# EAGLE board PCB-111000_V2 (EAGLE 9.6.2)
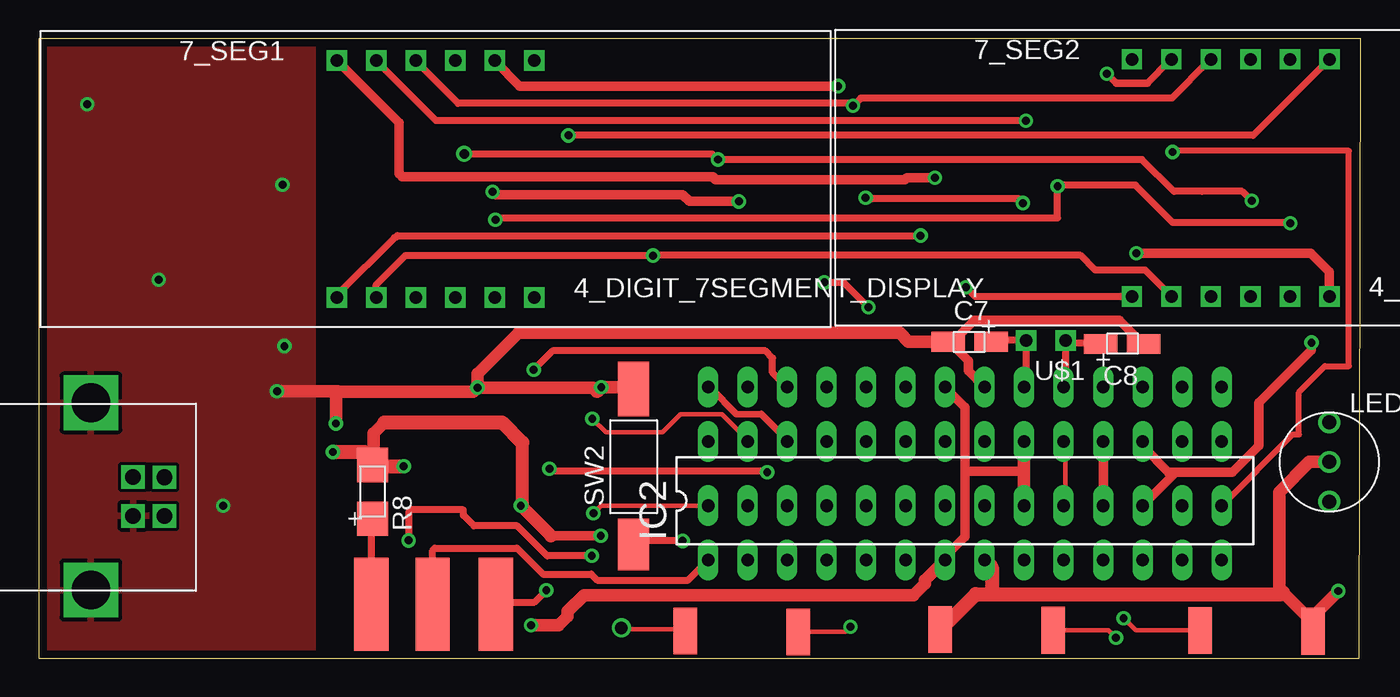
[diagram p0: board, top side]
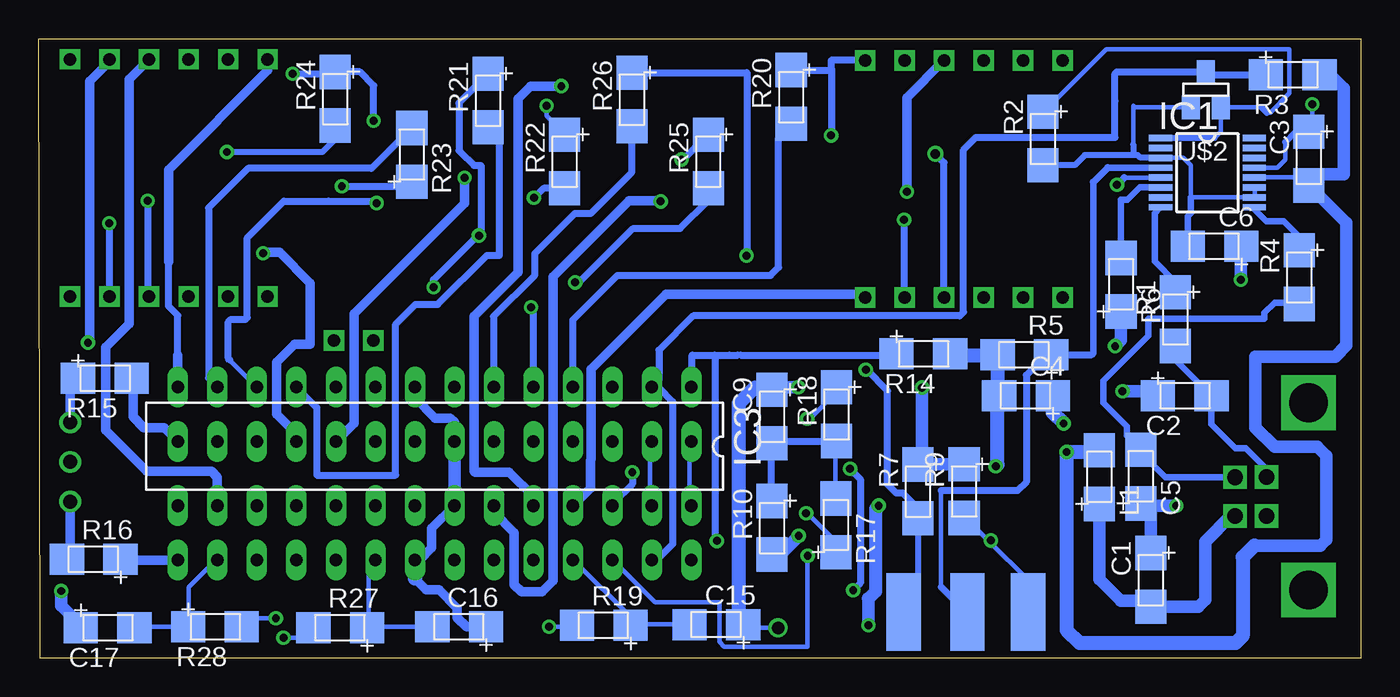
[diagram p1: board, bottom side, seen from below]

Size 85 x 39.8 mm. Coordinates in mm from the lower left corner, seen from the top.
Outline: 0,0 84.9,0 85,39.8 0,39.8 0,0
Copper layers (1*16): Top 0.035mm / dielectric 1.5mm / Bottom 0.035mm
Design rules "default *": minimum track width 12mil, minimum drill 20mil, track to track 8mil, track to pad 8mil, pad to pad 8mil, via to via 8mil, smd to smd 8mil, copper to edge 20mil, drill to drill 8mil, minimum pad ring 10mil, minimum via ring 8mil, stop-mask expansion 4mil, vias tented up to drill 0mil, thermal gap 10mil

## Footprints (pad centres in the part's own frame; a part is rotated, then mirrored left to right if it is on the bottom)
4_DIGIT_7SEGMENT_DISPLAY = drill 0.8 square: P$1 0,0; P$2 2.54,0; P$3 5.08,0; P$4 7.62,0; P$5 10.16,0; P$6 12.7,0; P$7 12.7,15.24; P$8 10.16,15.24; P$9 7.62,15.24; P$10 5.08,15.24; P$11 2.54,15.24; P$12 0,15.24
1206 = smd 2.2 x 2: P$1 -1.75,0; P$2 1.7,0
0805 = smd 2.159 x 1.27: 1 -1.404,0.1; 2 1.354,0.1
SSOP16 = smd 1.5 x 0.406: 1 -3.018,2.223; 2 -3.018,1.587; 3 -3.018,0.953; 4 -3.018,0.318; 5 -3.018,-0.318; 6 -3.018,-0.953; 7 -3.018,-1.587; 8 -3.018,-2.223; 9 3.018,-2.223; 10 3.018,-1.587; 11 3.018,-0.953; 12 3.018,-0.318; 13 3.018,0.318; 14 3.018,0.953; 15 3.018,1.587; 16 3.018,2.223
DIL28-3 = drill 0.813 long: 1 -16.51,-3.81; 2 -13.97,-3.81; 3 -11.43,-3.81; 4 -8.89,-3.81; 5 -6.35,-3.81; 6 -3.81,-3.81; 7 -1.27,-3.81; 8 1.27,-3.81; 9 3.81,-3.81; 10 6.35,-3.81; 11 8.89,-3.81; 12 11.43,-3.81; 13 13.97,-3.81; 14 16.51,-3.81; 15 16.51,3.81; 16 13.97,3.81; 17 11.43,3.81; 18 8.89,3.81; 19 6.35,3.81; 20 3.81,3.81; 21 1.27,3.81; 22 -1.27,3.81; 23 -3.81,3.81; 24 -6.35,3.81; 25 -8.89,3.81; 26 -11.43,3.81; 27 -13.97,3.81; 28 -16.51,3.81
CA_DUAL_LED = drill 0.9: 1 0,2.54; 2 0,0; 3 0,-2.54
USB-B = drill 1 square: 1 2.475,0.02; 2 -0.01,0.015; 3 -0.03,-2; 4 2.47,-2 | drill 2.5 square: 5 -4.8,-4.71; 6 7.24,-4.71
DPDT_SWITCH = smd 2.2 x 5: 1 -0.87,1.5; 2 7.13,1.5; 3 3.03,1.5 | smd 2.2 x 6 bottom: 4 -0.87,1; 5 7.13,1; 6 3.07,1
SM_NO_PUSH_BUTTON = smd 3.3 x 2: P$1 -2,1.5 | smd 3.5 x 2: P$2 8,1.5
RE51-0711 = smd 1.5 x 3: P$1 0.77,1.48; P$2 8.03,1.43
XTAL_VIAS = drill 0.8 square: P$1 0,1.27; P$2 0,-1.27
SOT-23 = smd 1.143 x 1.524: 1 0.025,-1.143; 2 -0.94,1.143; 3 0.991,1.143

## Placement (x,y rotation side)
7_SEG1  4_DIGIT_7SEGMENT_DISPLAY  [4_DIGIT_7SEGMENT_DISPLAY]  19.16,23.17 0 top
7_SEG2  4_DIGIT_7SEGMENT_DISPLAY  [4_DIGIT_7SEGMENT_DISPLAY]  70.29,23.25 0 top
C1  10n  [1206]  13.5,5 270 bottom
C2  47p  [1206]  11.29,16.87 0 bottom
C3  100n  [1206]  3.32,32.08 270 bottom
C4  4u7  [1206]  21.55,16.87 180 bottom
C5  47p  [1206]  14.14,11.69 90 bottom
C6  100n  [1206]  9.42,26.47 180 bottom
C7  18p  [0805]  59.83,20.44 180 top
C8  18p  [0805]  69.69,20.09 0 top
C9  10nF  [1206]  37.85,15.5 270 bottom
C15  10nF  [1206]  41.45,2.15 180 bottom
C16  10nF  [1206]  58,2 180 bottom
C17  10nF  [1206]  80.55,1.95 0 bottom
IC1  FT230XS  [SSOP16]  9.85,31.2 0 bottom
IC2  MEGA8-P  [DIL28-3]  59.55,10.1 0 top
IC3  MEGA8-P  [DIL28-3]  59.55,13.6 180 bottom
L1  CHOKE  [1206]  16.8,11.65 90 bottom
LED1  [CA_DUAL_LED]  82.99,12.6 0 top
R1  27R  [1206]  11.91,21.76 270 bottom
R2  10K  [1206]  20.43,33.37 270 bottom
R3  10K  [1206]  4.35,37.5 0 bottom
R4  27R  [1206]  3.94,24.46 270 bottom
R5  3K9  [1206]  21.65,19.5 180 bottom
R6  3k9  [1206]  15.41,24.02 90 bottom
R7  22K  [1206]  28.46,10.69 270 bottom
R8  10K  [1206]  21.45,10.7 90 top
R9  22K  [1206]  25.5,10.7 270 bottom
R10  100R  [1206]  37.85,8.35 270 bottom
R14  10K  [1206]  28.1,19.55 0 bottom
R15  560  [1206]  80.73,17.99 0 bottom
R16  560  [1206]  81.5,6.35 180 bottom
R17  3K9  [1206]  33.75,8.55 90 bottom
R18  3K9  [1206]  33.7,15.65 270 bottom
R19  220  [1206]  48.7,2.1 180 bottom
R20  330  [1206]  36.62,36.05 270 bottom
R21  330  [1206]  56.11,35.81 270 bottom
R22  330  [1206]  51.19,31.89 270 bottom
R23  330  [1206]  61.02,32.37 90 bottom
R24  330  [1206]  65.94,35.92 270 bottom
R25  330  [1206]  41.95,31.89 270 bottom
R26  330  [1206]  46.86,35.88 270 bottom
R27  220  [1206]  65.65,1.95 180 bottom
R28  220  [1206]  73.65,2 0 bottom
SKT1  USB-B  [USB-B]  8.06,11.61 270 top
SW1  DPDT  [DPDT_SWITCH]  22.25,4.45 180 bottom
SW2  NO_SW  [SM_NO_PUSH_BUTTON]  39.75,9.3 90 top
SW3  NO_PB_1  [RE51-0711]  40.8,0.25 0 top
SW4  NO_PB_1  [RE51-0711]  57.2,0.35 0 top
SW5  NO_PB_1  [RE51-0711]  82.7,3.2 180 top
U$1  XTAL  [XTAL_VIAS]  64.75,20.4 90 top
U$2  ZVN3306FTA  [SOT-23]  9.93,36.53 180 bottom

## Library data of the parts
7_SEG1 7_SEG2 = 1_marko
C1-C6 C9 C15-C17 L1 R1-R10 R14-R28 SW1 SW2 = 1_Home_library
C7 C8 IC1 SW3-SW5 U$1 = 1_3V3_Bootloader
IC2 IC3 = 1_Home_library; OC_FARNELL: unknown; OC_NEWARK: unknown
LED1 SKT1 = 3_My_prog
U$2 = mo

## Nets
0V: C1.P$1 C2.P$1 C3.P$1 C4.P$1 C5.P$1 C6.P$1 C7.2 C8.2 C9.P$1 C15.P$1 C16.P$1 C17.P$1 IC1.5 IC1.13 IC2.8 IC2.22 IC3.8 IC3.22 LED1.2 R6.P$1 R7.P$1 R9.P$1 SKT1.4 SKT1.5 SKT1.6 SW2.P$2 SW3.P$1 SW4.P$1 SW5.P$1
+5V: C3.P$2 C4.P$2 IC1.12 IC2.7 IC2.20 IC3.7 IC3.20 L1.P$2 R3.P$2 R5.P$2 R8.P$2 R10.P$2 R14.P$2
DISPLAY_DRIVER0: IC3.15 R24.P$2
DISPLAY_DRIVER1: IC3.4 R20.P$2
DISPLAY_DRIVER2: IC3.5 R25.P$2
DISPLAY_DRIVER3: IC3.6 R26.P$2
DISPLAY_DRIVER4: IC3.11 R21.P$2
DISPLAY_DRIVER5: IC3.12 R22.P$2
DISPLAY_DRIVER6: IC3.13 R23.P$2
DISPLAY_DRIVER8: 7_SEG2.P$12 IC3.14
DISPLAY_DRIVER9: 7_SEG2.P$9 IC3.16
DISPLAY_DRIVER10: 7_SEG2.P$8 IC2.17 IC3.17
DISPLAY_DRIVER11: 7_SEG2.P$6 IC2.18 IC3.18
DISPLAY_DRIVER12: 7_SEG1.P$12 IC2.19 IC3.19
DISPLAY_DRIVER13: 7_SEG1.P$9 IC3.23
DISPLAY_DRIVER14: 7_SEG1.P$8 IC3.24
DISPLAY_DRIVER15: 7_SEG1.P$6 IC3.25
N$1: IC2.14 R16.P$1
N$2: IC2.15 R15.P$2
N$3: LED1.1 R15.P$1
N$4: LED1.3 R16.P$2
N$5: IC3.26 SW1.5
N$6: IC3.3 R7.P$2 SW1.2
N$7: R27.P$2 SW4.P$2
N$8: R19.P$2 SW3.P$2
N$9: C6.P$2 IC1.3 IC1.10 IC1.11 R2.P$2 U$2.3
N$10: C7.1 IC3.9 U$1.P$1
N$11: C17.P$2 IC2.13 R28.P$1
N$12: C8.1 IC3.10 U$1.P$2
N$13: R8.P$1 SW1.4
N$14: IC2.3 R9.P$2 SW1.1
N$15: IC1.1 R2.P$1 U$2.2
N$16: R28.P$2 SW5.P$2
N$17: C15.P$2 IC2.4 R19.P$1
N$18: IC1.9 R4.P$1
N$19: C16.P$2 IC2.9 R27.P$1
N$20: C9.P$2 R10.P$1 R17.P$2 R18.P$2
N$25: IC1.8 R1.P$1
N$26: IC2.1 SW1.6
N$27: C5.P$2 R4.P$2 SKT1.2
N$29: C2.P$2 R1.P$2 SKT1.3
N$30: C1.P$2 L1.P$1 SKT1.1
N$31: IC2.26 IC3.1 R14.P$1 SW2.P$1
N$34: IC1.6 R6.P$2
N$35: IC1.4 R5.P$1 SW1.3
N$38: IC2.28 IC3.28 R17.P$1
N$39: IC2.27 IC3.27 R18.P$1
N$40: IC2.2 IC3.2 R3.P$1 U$2.1
SEVEN_SEG0: 7_SEG1.P$11 7_SEG2.P$11 R24.P$1
SEVEN_SEG1: 7_SEG1.P$7 7_SEG2.P$7 R20.P$1
SEVEN_SEG2: 7_SEG1.P$4 7_SEG2.P$4 R25.P$1
SEVEN_SEG3: 7_SEG1.P$2 7_SEG2.P$2 R26.P$1
SEVEN_SEG4: 7_SEG1.P$1 7_SEG2.P$1 R21.P$1
SEVEN_SEG5: 7_SEG1.P$10 7_SEG2.P$10 R22.P$1
SEVEN_SEG6: 7_SEG1.P$5 7_SEG2.P$5 R23.P$1

## Tracks (layer width: path | path; a pad name or v marks a point on that pad's centre or on a via)
0V  (via drill 0.51, 0.81)
  Top 0.305: 70.93,20.26 C8.2 | 58.71,20.26 C7.2 | 81.89,2.34 81.89,1.92 81.89,1.84 SW5.P$1 | 38.23,17.4 SW2.P$2 | 41.56,1.84 SW3.P$1 41.72,1.84 41.56,1.84 | v37.45,1.94 37.55,1.84 41.56,1.84
  Top 0.61: 70.93,20.26 69.49,21.7 60.15,21.7 58.71,20.26 | IC3.8 59.77,18.47 59.77,19.12 58.55,20.34 C7.2
  Top 0.813: v36.16,17.4 38.23,17.4 | C7.2 55.94,20.34 55.36,20.91 30.84,20.91 28.2,18.28 v28.2,17.38 | 81.89,2.34 80,4.22 79.78,4.45 79.78,10.67 81.71,12.6 LED1.2 | v83.56,4.3 81.89,2.63 81.89,1.92 | v28.2,17.38 35.63,17.38 35.89,17.12 | v28.2,17.38 27.93,17.12 19.27,17.12 | 19.27,17.12 19.1,16.95 v19.1,15.08 | v15.31,17.15 19.23,17.15 19.27,17.12
  Top 0.831: 35.89,17.12 v36.16,17.4
  Top 0.914: IC2.8 61.28,5.83 61.28,4.11 | 61.28,4.11 79.89,4.11 80,4.22 | SW4.P$1 60.25,4.11 61.28,4.11
  Bottom 0.305: 82.2,2 C17.P$1 | C16.P$1 56.33,2 | 37.91,17.24 C9.P$1 37.75,17.4 | 25.53,12.48 R9.P$1 | IC1.13 6.8,31.53 5.37,31.53 4.86,32.04 4.86,33.17 | C15.P$1 39.5,1.95 37.47,1.95 v37.45,1.94 | v3.11,35.59 3.11,34.04 C3.P$1 | 15.2,30.88 IC1.5
  Bottom 0.381: 4.86,33.17 4.2,33.83 C3.P$1
  Bottom 0.457: v15.66,30.42 15.2,30.88
  Bottom 0.61: IC3.22 59.73,8.34 59.73,7.08 60.52,6.29 IC2.8 | IC2.22 58.28,15.16 58.54,15.42 59.53,15.42 60.82,16.72 IC3.8 | 56.33,2 57.5,2 58.09,2.59 58.09,3.21 59.27,4.39 60.1,4.39 60.82,5.11
  Bottom 0.813: v36.16,17.4 37.75,17.4 37.91,17.24 | IC2.22 IC3.22 | v83.56,4.3 83.56,3.36 82.2,2 | 25.53,12.48 25.57,12.44 R7.P$1 28.2,12.7 v28.2,17.38 | C2.P$1 13.33,17.15 v15.31,17.15 | R6.P$1 15.41,20.44 v15.79,20.05 | v11.85,9.8 14,9.8 C5.P$1 13.5,9.3 C1.P$1
  Bottom 0.815: v7.71,24.31 7.71,26.42 C6.P$1
  Bottom 0.914: v19.1,15.08 19.8,15.77 C4.P$1 | C15.P$1 40,2.45 40,16.34 38.95,17.4 37.75,17.4 | IC2.8 60.82,5.11
  pour Top: 0.4,40.05 17.6,40.05 17.6,0.5 0.4,0.5
+5V  (via drill 0.51)
  Top 0.305: 20.93,13.24 R8.P$2 21.56,12.32
  Top 0.61: IC2.7 58.28,6.52 59.56,7.81 59.56,11.91 | 59.56,11.91 59.67,12.01 63.36,12.01 | IC3.7 59.56,16.12 59.56,11.91 | v36.13,7.85 32.93,7.85
  Top 0.813: 22.22,15.14 21.54,14.46 21.54,12.34 21.56,12.32 | IC2.7 56.97,4.98 56.97,4.78 56.24,4.05 35.05,4.05 33.99,2.99 33.99,2.67 33.43,2.11 v31.66,2.11 | IC2.20 63.36,12.01 IC3.20
  Top 0.838: 32.93,7.85 v30.99,9.79 | v30.99,9.79 v30.99,9.8 | 31.08,13.84 31.08,9.88 v30.99,9.79
  Top 0.914: v18.91,13.24 20.93,13.24 | 21.56,12.32 v23.47,12.32 | 22.22,15.14 29.78,15.14 31.08,13.84
  Bottom 0.305: IC1.12 6.8,30.89 3.42,30.89 C3.P$2 2.59,31.11 | 23.47,19.46 R5.P$2 | 26.32,19.46 R14.P$2 | 1.96,37.5 R3.P$2
  Bottom 0.813: v31.66,2.11 31.66,3.81 | 2.59,31.11 1.1,31.11 1.1,36.64 1.96,37.5 | C3.P$2 0.91,27.97 0.91,20.11 1.64,19.38 6.77,19.38 6.77,14.81 5.53,13.58 2.77,13.58 2.21,13.01 2.21,7.6 2.59,7.23 6.84,7.23
  Bottom 0.838: 31.66,3.81 31.19,4.29 31.19,9.61 v30.99,9.8 | v36.13,7.85 37.34,6.65 R10.P$2
  Bottom 0.914: 26.32,19.46 23.47,19.46 | L1.P$2 16.91,13.24 v18.91,13.24 18.91,1.79 18.09,0.97 8.04,0.97 7.58,1.42 7.58,6.48 6.84,7.23 | R5.P$2 23.35,16.97 | 23.35,16.97 C4.P$2 | v23.47,12.32 23.35,12.44 23.35,16.97
DISPLAY_DRIVER0  (via drill 0.51)
  Top 0.381: IC3.15 80.64,14.37 81.03,14.37 81.03,17.08 82.71,18.76 84.24,18.76 84.24,32.61 72.98,32.61 v72.91,32.53
  Bottom 0.381: v72.91,32.53 66.77,32.53 65.94,33.36 R24.P$2
DISPLAY_DRIVER1
  Bottom 0.305: 37.44,33.43 36.64,34.23 R20.P$2
  Bottom 0.457: 37.44,33.43 37.44,25.11 37.95,24.6 47.8,24.6 50.66,21.73 IC3.4
DISPLAY_DRIVER2  (via drill 0.51)
  Top 0.457: v50.51,24.15 51.75,24.15 v53.35,22.55
  Bottom 0.381: 53.2,22.4 v53.35,22.55
  Bottom 0.457: IC3.5 53.2,22.4 | v50.51,24.15 50.25,24.15 46.78,27.61 43.76,27.61 41.95,29.42 R25.P$2
DISPLAY_DRIVER3
  Bottom 0.457: IC3.6 55.74,21.91 55.78,21.95 53.11,24.62 53.11,26.02 50.53,28.59 49.51,28.59 46.86,31.23 R26.P$2
DISPLAY_DRIVER4
  Bottom 0.381: 55.38,34.11 R21.P$2
  Bottom 0.457: IC3.11 67.12,16.09 67.12,11.75 62.05,11.75 62.05,21.46 60.78,22.73 59.35,22.73 56.19,25.89 55.38,25.89 55.38,34.11
DISPLAY_DRIVER5  (via drill 0.51)
  Top 0.305: v53.17,29.58 53.17,29.53 | v63.28,29.25 63,29.53
  Top 0.457: 63,29.53 53.17,29.53
  Bottom 0.305: v63.28,29.25 63.41,29.37 | IC3.12 72.72,19.16
  Bottom 0.457: R22.P$2 52.55,30.19 v53.17,29.58 | 63.41,29.37 66.39,29.37 69.25,29.37 71.6,27.03 71.6,21.89 71.72,21.77 72.66,21.77 72.83,21.6 72.83,19.26 72.72,19.16
DISPLAY_DRIVER6
  Bottom 0.457: R23.P$2 63.61,31.47 71.55,31.47 74.09,28.93 74.09,17.98 IC3.13
DISPLAY_DRIVER8
  Bottom 0.457: 76.06,19.45 76.06,22.02 76.66,22.62 76.66,25.46
  Bottom 0.61: 7_SEG2.P$12 70.29,37.77 76.66,31.4 76.66,25.46 | IC3.14 76.06,19.45
DISPLAY_DRIVER9
  Bottom 0.61: IC3.16 73.52,11.62 73.9,11.99 78.07,11.99 80.7,14.63 80.7,19.97 79.19,21.47 79.19,37.2 7_SEG2.P$9
DISPLAY_DRIVER10  (via drill 0.51)
  Top 0.61: 73.1,11.95 76.76,11.95 78.47,13.66 78.47,16.41 81.84,19.79 v81.84,20.28 | 73.1,11.95 72.63,11.95 70.98,13.6 IC2.17 | 73.1,11.95 70.98,9.83 IC3.17
  Bottom 0.305: 80.46,38.36 7_SEG2.P$8
  Bottom 0.61: 80.46,38.36 81.74,37.07 81.74,20.37 v81.84,20.28
DISPLAY_DRIVER11  (via drill 0.51)
  Top 0.61: 7_SEG2.P$6 82.99,24.81 81.78,26.02 v70.58,26.02 | IC2.18 IC3.18
  Bottom 0.61: IC2.18 68.44,14.41 69.69,15.66 69.69,19.02 68.56,20.16 67.54,20.16 67.54,24.1 69.52,26.08 70.52,26.08 v70.58,26.02
DISPLAY_DRIVER12  (via drill 0.51)
  Top 0.305: IC3.19 66.01,9.94 66.01,13.91 IC2.19
  Top 0.61: 7_SEG1.P$12 23.16,34.41 23.16,31.14 23.37,30.94 43.34,30.94 43.52,30.75 55.7,30.75 55.82,30.87 v57.63,30.87
  Bottom 0.61: IC2.19 64.73,15.08 64.73,16.26 64.73,16.27 64.73,22.12 57.63,29.22 v57.63,30.87
DISPLAY_DRIVER13  (via drill 0.51)
  Top 0.61: v45.01,29.35 41.84,29.35 41.4,29.79 29.36,29.79 v29.18,29.97
  Bottom 0.61: v45.01,29.35 45.05,29.39 47.04,29.39 51.93,24.5 51.93,4.97 52.65,4.25 53.97,4.25 54.44,4.72 54.44,8.06 55.74,9.37 IC3.23 | 7_SEG1.P$9 29.18,36.02 v29.18,29.97
DISPLAY_DRIVER14  (via drill 0.51)
  Top 0.305: 29.34,38.36 7_SEG1.P$8
  Top 0.61: 29.34,38.36 30.93,36.77 v51.4,36.77
  Bottom 0.61: IC3.24 53.2,10.39 54.75,11.95 56.94,11.95 57.01,12.02 57.01,21.98 54.19,24.81 54.19,35.96 53.38,36.77 v51.41,36.77 v51.4,36.77
DISPLAY_DRIVER15
  Bottom 0.61: IC3.25 49.53,10.91 49.53,12.72 49.49,12.77 49.49,18.56 44.66,23.38 32.07,23.38 7_SEG1.P$6
N$1
  Bottom 0.305: 79.66,6.29 R16.P$1 | 76.17,6.29 IC2.14
  Bottom 0.61: 76.17,6.29 79.66,6.29
N$2
  Bottom 0.305: 78.95,17.92 R15.P$2
  Bottom 0.61: IC2.15 76.95,14.8 78.25,14.8 78.95,15.5 78.95,17.92
N$3
  Bottom 0.61: R15.P$1 82.99,17.48 LED1.1
N$4
  Bottom 0.305: 83,6.6 83.16,6.45 R16.P$2 | 83,9.94 LED1.3
  Bottom 0.61: 83,9.94 83,6.6
N$5  (via drill 0.51)
  Top 0.305: 46.79,11.99 v46.84,11.95 | v32.83,12.16 33,11.99 | 29.5,3.59 SW1.5
  Top 0.457: 46.79,11.99 33,11.99 | v32.63,4.35 31.88,3.59 29.5,3.59
  Bottom 0.305: 48.07,9.94 IC3.26
  Bottom 0.457: 48.07,9.94 46.84,11.17 v46.84,11.95 | v32.83,12.16 32.17,11.51 32.17,4.81 v32.63,4.35
N$6  (via drill 0.51)
  Top 0.457: IC3.3 47.19,18.34 47.19,19.27 46.72,19.74 33.03,19.74 v31.82,18.54 v31.82,18.53
  Bottom 0.305: 29.5,2.95 SW1.2
  Bottom 0.381: R7.P$2 28.46,3.99 29.5,2.95
  Bottom 0.457: R7.P$2 28.46,9.62 29.43,10.59 29.85,10.59 30.41,11.16 30.41,17.18 31.76,18.53 v31.82,18.53
N$7  (via drill 0.51)
  Top 0.305: v69.27,1.3 68.79,1.78 SW4.P$2
  Bottom 0.305: R27.P$2 68,1.3 v69.27,1.3
N$8  (via drill 0.51)
  Top 0.305: v52.2,2 51.88,1.68 48.87,1.68 SW3.P$2
  Bottom 0.305: v52.2,2 50.45,2 R19.P$2
N$9
  Bottom 0.305: IC1.11 6.8,30.1 6.8,29.62 IC1.10 6.95,29.62 10.92,29.62 10.92,31.69 11.4,32.16 12.83,32.16 IC1.3 | 14.63,33.01 14.63,35.5 14.52,35.39 U$2.3 | 20.29,31.69 R2.P$2
  Bottom 0.381: 20.29,31.69 18.38,31.69 17.75,32.32 14.66,32.32 | 14.66,32.32 14.33,32.32 14.17,32.16 12.88,32.16 IC1.3 | 14.63,33.01 14.63,32.35 14.66,32.32
  Bottom 0.406: 10.92,29.62 10.92,28.61 11.12,28.41 C6.P$2
N$10
  Top 0.305: 61.25,20.42 C7.1 | 63.47,20.42 U$1.P$1 63.47,20.26 | 63.47,17.56 IC3.9
  Top 0.457: 63.47,20.42 61.25,20.42 | 63.47,20.26 63.47,17.56
N$11
  Bottom 0.305: C17.P$2 78.71,2 75.53,2 R28.P$1 75.38,2 75.38,4.54 73.63,6.29 IC2.13
N$12
  Top 0.305: 68.23,20.26 C8.1 | 66.17,20.26 U$1.P$2 66.01,20.26 | 66.01,17.56 IC3.10
  Top 0.457: 66.17,20.26 68.23,20.26 | 66.01,20.26 66.01,17.56
N$13
  Top 0.305: 21.4,8.83 R8.P$1 | 21.4,3.59 SW1.4
  Top 0.457: 21.4,3.59 21.4,8.83
N$14  (via drill 0.51)
  Top 0.457: v35.56,6.57 32.69,6.57 30.76,8.5 27.98,8.5 27.3,9.17 27.3,9.5 27.27,9.53 23.92,9.53 23.78,9.39 v23.78,7.56
  Bottom 0.305: 23.86,7.48 21.4,5.02 21.4,2.95 SW1.1 | 23.86,7.48 25.37,8.99 R9.P$2 | v35.56,6.57 35.56,0.73 40.93,0.73 41.24,1.05 41.24,3.59 45.37,3.59 48.07,6.29 IC2.3 | v23.78,7.56 23.86,7.48
N$15
  Bottom 0.305: IC1.1 12.83,33.43 | R2.P$1 20.29,35.18 16.34,39.13 4.57,39.13 4.57,36.29 5.82,35.04 6.02,35.04 | 6.37,35.39 U$2.2 9,33.83 9.39,33.43
  Bottom 0.381: 12.83,33.43 9.39,33.43
  Bottom 0.406: 6.02,35.04 6.37,35.39
N$16  (via drill 0.51)
  Top 0.305: SW5.P$2 70.55,1.77 v69.76,2.56
  Bottom 0.305: R28.P$2 71.39,2.56 v69.76,2.56
N$17
  Bottom 0.305: C15.P$2 46.8,2.16 R19.P$1 46.8,2.32 46.8,2.48 50.61,6.29 IC2.4
N$18
  Bottom 0.406: IC1.9 6.83,28.85 6.07,28.08 4.95,28.08 3.94,27.08 R4.P$1
N$19
  Bottom 0.305: C16.P$2 59.82,2 63.79,2 R27.P$1 63.79,2.16 63.79,5.97 63.47,6.29 IC2.9
N$20
  Bottom 0.305: 37.91,10.26 R10.P$1 | 37.91,13.75 C9.P$2 37.75,13.91 | R17.P$2 33.78,10.26 33.78,13.91 R18.P$2 33.94,13.91
  Bottom 0.457: 37.91,13.75 37.91,10.26 | 33.94,13.91 37.75,13.91
N$25
  Bottom 0.406: R1.P$1 11.91,24.16 13.25,25.49 13.25,28.6 IC1.8
N$26
  Top 0.457: SW1.6 25.32,6.92 25.45,7.06 30.74,7.06 32.42,5.38 35.52,5.38 35.91,5 41.75,5 IC2.1
N$27
  Bottom 0.305: 14.09,13.52 C5.P$2 | 4.03,22.85 R4.P$2
  Bottom 0.406: SKT1.2 12.55,11.62 14.09,13.16 14.09,13.52 | C5.P$2 15.04,14.28 15.04,14.91 16.55,16.42 16.55,17.81 13.64,20.73 13.64,21.8 6.18,21.8 6.18,22.2 5.53,22.85 4.03,22.85
N$29
  Bottom 0.406: SKT1.3 6.06,12.16 7.39,13.49 8.07,13.49 9.59,15.02 C2.P$2 11.91,19.19 R1.P$2
N$30
  Bottom 0.813: SKT1.1 8.34,9.13 10,7.48 10,3.74 10.44,3.3 C1.P$2 13.21,3.59 13.21,3.98 13.5,3.69 15.43,3.69 16.8,5.05 L1.P$1
N$31  (via drill 0.51)
  Top 0.305: 48.07,14.07 IC2.26 | 43.15,17.4 IC3.1 | 38.52,7.53 38.39,7.4 SW2.P$1
  Top 0.406: 44.88,15.67 46.46,15.67
  Top 0.457: 46.46,15.67 48.07,14.07 | 43.15,17.4 44.88,15.67 | v41.4,7.53 38.52,7.53
  Bottom 0.305: 40.61,19.46 40.05,19.46 39.88,19.46 | 29.97,19.46 R14.P$1 | 42.99,17.56 IC3.1 | 41.53,7.66 v41.4,7.53
  Bottom 0.457: 40.61,19.46 42.99,19.46 42.99,17.56 | 40.05,19.46 41.53,19.46 41.53,7.66 | 39.88,19.46 29.97,19.46
N$34
  Bottom 0.406: R6.P$2 15.41,29.45 14.99,29.45 14.2,30.25 IC1.6
N$35
  Bottom 0.305: 25.37,2.95 SW1.3 | 26.99,10.76 26.99,4.57
  Bottom 0.406: IC1.4 16.26,31.52 | 17.2,19.6 17.2,30.58
  Bottom 0.457: 26.99,10.76 22.06,10.76 21.51,11.31 21.51,18.18 20.19,19.5 R5.P$1 17.3,19.5 17.2,19.6 | 26.99,4.57 25.37,2.95 | 17.2,30.58 16.26,31.52
N$38  (via drill 0.51)
  Top 0.305: v35.66,9.3 36.14,9.78 42.99,9.78 IC3.28
  Bottom 0.305: v35.66,9.3 35.58,9.3 34.01,7.74 R17.P$1 | IC2.28 43.15,13.91 43.15,9.94 IC3.28
N$39  (via drill 0.51)
  Top 0.305: v35.59,15.39 36.48,14.5 40.12,14.5 41.27,15.65 43.94,15.65 45.53,14.07 IC2.27
  Bottom 0.305: R18.P$1 33.7,17.11 35.42,15.39 v35.59,15.39 | IC3.27 45.69,9.94 45.69,13.91 IC2.27
N$40
  Bottom 0.305: 15.79,37.57 15.68,37.68 | U$2.1 9.78,37.5
  Bottom 0.457: IC2.2 45.27,6.29 44.24,7.32 44.24,16.48 45.16,17.41 IC3.2 45.12,17.87 45.12,19.8 42.92,22 25.77,22 25.54,22.23 25.54,32.67 24.74,33.47 15.79,33.47 15.79,35.82 15.79,37.57 | 15.68,37.68 U$2.1 | 9.78,37.5 R3.P$1
SEVEN_SEG0  (via drill 0.51)
  Top 0.305: 72.68,38.36 7_SEG2.P$11 | 21.72,38.36 7_SEG1.P$11
  Top 0.457: 69.28,36.96 v68.68,37.56 | 72.68,38.36 71.28,36.96 | 21.72,38.36 25.53,34.55 v63.47,34.55
  Top 0.475: 71.28,36.96 69.28,36.96
  Bottom 0.457: v63.47,34.55 63.47,36.79 64.36,37.67 R24.P$1 66.05,37.56 v68.68,37.56
SEVEN_SEG1  (via drill 0.51)
  Top 0.457: 7_SEG2.P$7 78.09,33.59 v34.05,33.59
  Bottom 0.457: v34.05,33.59 34.02,33.63 34.02,37.88 34.06,37.92 | 7_SEG1.P$7 34.05,38.42 34.06,38.42 34.06,37.92 | R20.P$1 34.19,37.8 34.06,37.92
SEVEN_SEG2  (via drill 0.51, 0.61)
  Top 0.457: v78,29.39 77.39,30 74.8,30 72.99,30 70.95,32.05 44.66,32.05 v43.67,32.05 43.3,32.41 v27.35,32.41
  Bottom 0.305: 7_SEG2.P$4 78,23.34 | 42.04,33.59 R25.P$1
  Bottom 0.457: v78,29.39 78,23.34 | 7_SEG1.P$4 26.78,31.84 v27.35,32.41 | v43.67,32.05 43.59,32.05 42.04,33.59
SEVEN_SEG3  (via drill 0.51)
  Top 0.457: 7_SEG1.P$2 21.7,24.01 23.58,25.88 v39.49,25.88 | v39.49,25.88 v39.5,25.87 | v39.49,25.88 67,25.88 67.94,24.94 71.14,24.94 7_SEG2.P$2
  Bottom 0.457: R26.P$1 39.48,37.63 39.47,37.64 39.47,25.91 v39.5,25.87
SEVEN_SEG4  (via drill 0.51)
  Top 0.305: 19.19,23.34 7_SEG1.P$1
  Top 0.457: 19.19,23.34 22.88,27.03 22.94,27.03 23.06,27.16 v56.7,27.16 | v59.62,23.84 60.21,23.25 7_SEG2.P$1
  Bottom 0.457: R21.P$1 57.99,35.69 57.99,35.65 57.99,32.64 57.91,32.55 57.03,31.67 56.58,31.67 56.58,27.28 v56.7,27.16 56.79,27.16 59.62,24.33 v59.62,23.84
SEVEN_SEG5  (via drill 0.51)
  Top 0.305: 75.22,38.36 7_SEG2.P$10 | 24.26,38.36 7_SEG1.P$10 | 52.36,35.66 v52.36,35.5
  Top 0.457: v52.36,35.5 52.86,36 72.86,36 75.22,38.36 | 24.26,38.36 26.96,35.66 52.36,35.66
  Bottom 0.305: v52.36,35.5 52.36,34.86 51.25,33.75 R22.P$1
SEVEN_SEG6  (via drill 0.51)
  Top 0.305: 65.52,28.27 65.51,28.28
  Top 0.381: v65.51,30.33 65.57,30.39
  Top 0.457: 65.51,28.28 v65.51,30.33 | 65.52,28.27 29.46,28.27 v29.36,28.17 | 65.57,30.39 70.52,30.39 72.92,27.99 80.45,27.99 v80.48,27.95
  Bottom 0.305: 61.5,30.33 R23.P$1
  Bottom 0.457: v65.51,30.33 61.5,30.33 | 7_SEG2.P$5 80.45,27.92 v80.48,27.95 | 7_SEG1.P$5 29.32,28.14 v29.36,28.17